# EAGLE board WDT (EAGLE 8.5.0)
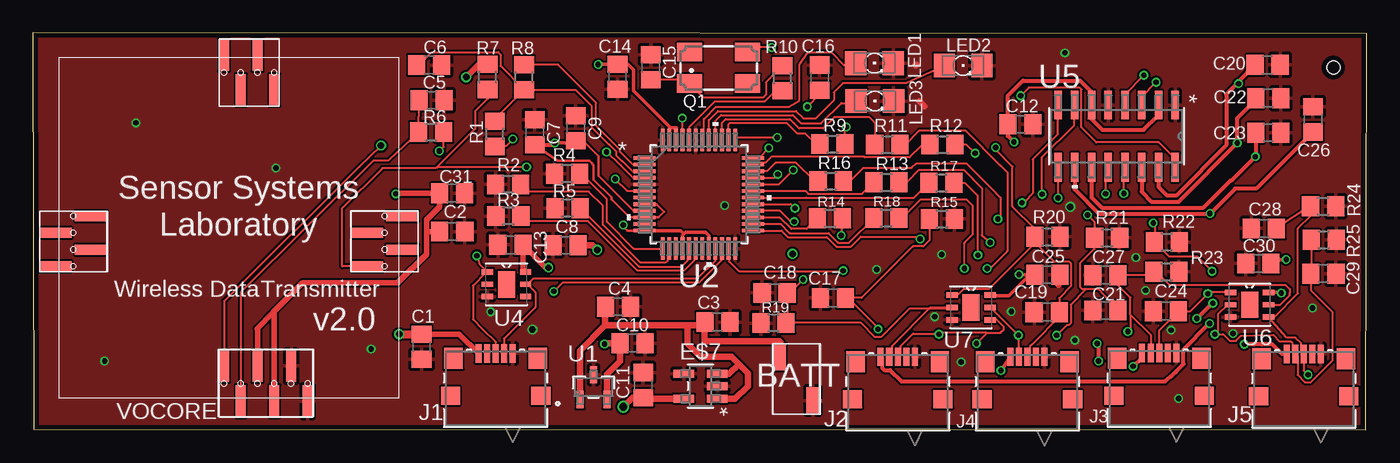
[diagram p0: board, top side]
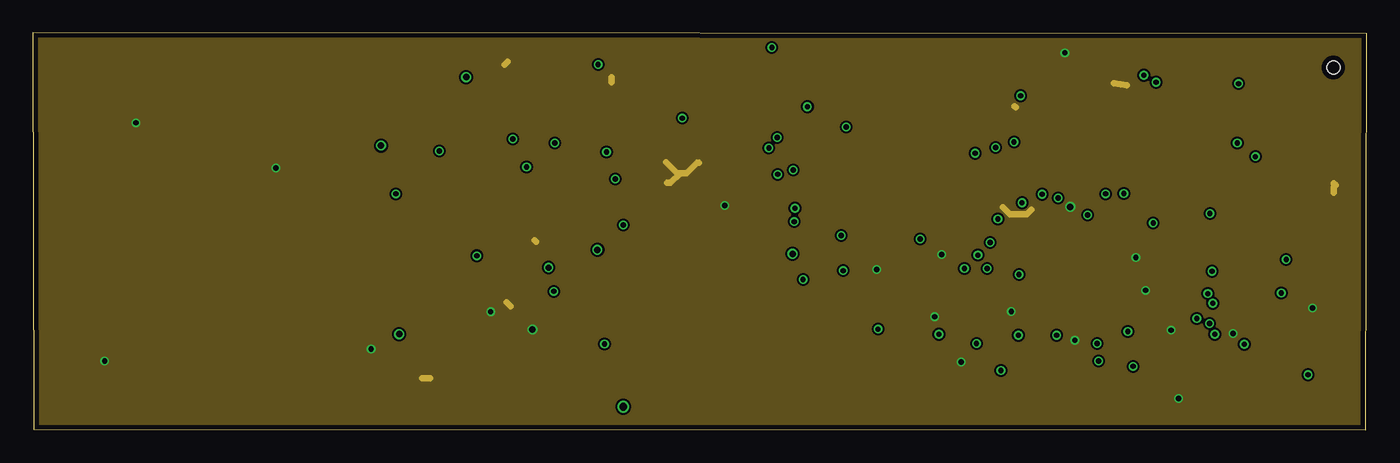
[diagram p1: board, inner layer Route2]
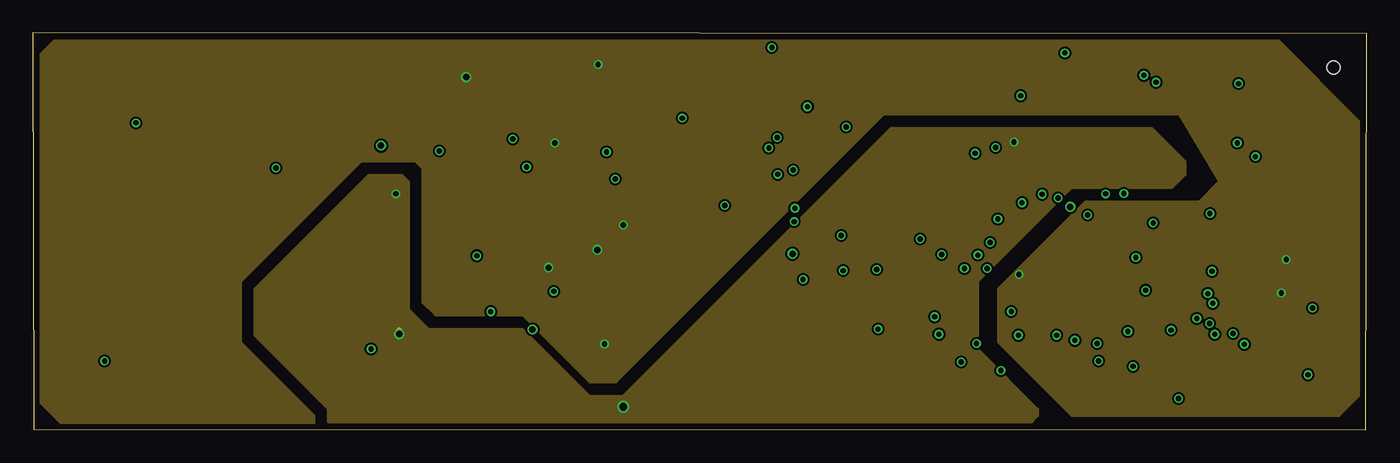
[diagram p2: board, inner layer Route3]
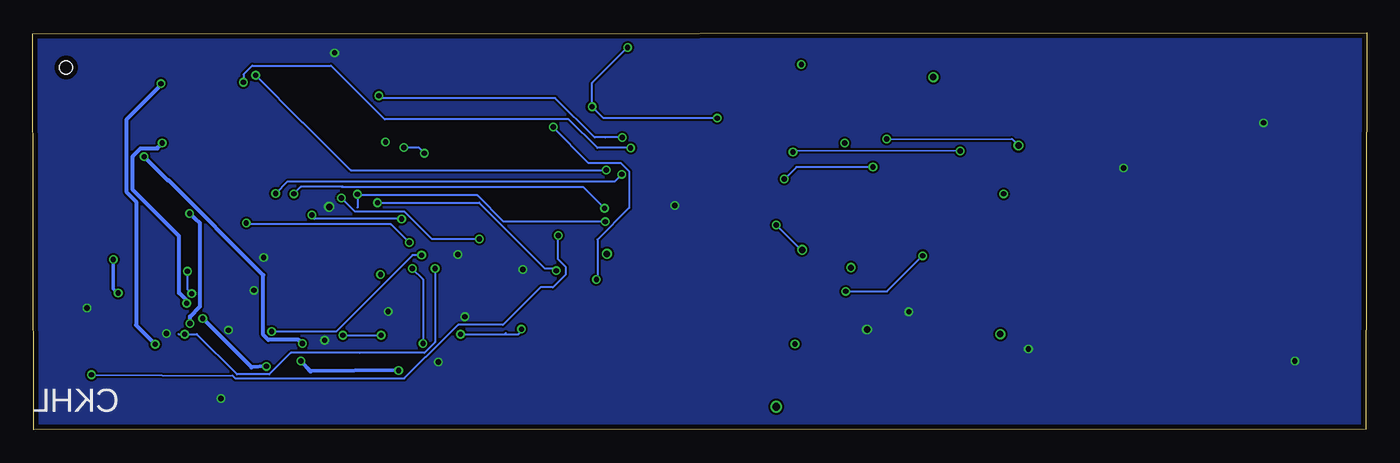
[diagram p3: board, bottom side, seen from below]

Size 101.17 x 30.08 mm. Coordinates in mm from the lower left corner, seen from the top.
Outline: 0.05,0.03 101.12,0 101.17,30 0,30.08 0.05,0.03
Copper layers ((1*2)+(3*16)): Top 0.035mm / dielectric 20mil / Route2 0.035mm / dielectric 20mil / Route3 0.035mm / dielectric 20mil / Bottom 0.035mm
Design rules "default *": minimum track width 6mil, minimum drill 15mil, track to track 6mil, track to pad 6mil, pad to pad 6mil, via to via 6mil, smd to smd 6mil, copper to edge 15mil, drill to drill 6mil, minimum pad ring 10mil, minimum via ring 5mil, stop-mask expansion 4mil, vias tented up to drill 15mil, thermal gap 10mil
Net classes: 0 default: width 0.102 mm, drill 0.203 mm, clearance 0.152 mm; 1 power: width 0.762 mm, drill 0.508 mm, clearance 0.254 mm; 2 usbsignal: width 0.305 mm, drill 0.508 mm, clearance 0.508 mm
Holes 1 mm at 98.65,27.46

## Footprints (pad centres in the part's own frame; a part is rotated, then mirrored left to right if it is on the bottom)
C0805 = smd 1.3 x 1.5: 1 -0.95,0; 2 0.95,0
FEMALE-POWER = smd 1 x 2: P$1 0.5,4.3; P$2 3.04,1
850-10-050-30-001101 = smd 0.762 x 2.413: P$1 0.381,3.873; P$2 1.651,1.206; P$3 2.921,3.873; P$4 4.191,1.206
850-10-050-30-001101' = smd 0.762 x 2.413: P$1 0.381,3.873; P$2 1.651,1.206; P$3 2.921,3.873; P$4 4.191,1.206; P$5 5.461,3.873; P$6 6.731,1.206
MF05A-M = smd 1.575 x 0.61: 1 -1.27,0.953; 2 -1.27,0; 3 -1.27,-0.953; 4 1.27,-0.953; 5 1.27,0.953
CONN_1981568-1 = smd 0.457 x 1.397: 1 0,-0.254; 2 0.65,-0.254; 3 1.3,-0.254; 4 1.95,-0.254; 5 2.6,-0.254 | smd 1.397 x 1.6: 6 -1.9,-0.635; 7 4.5,-0.635 | smd 1.448 x 1.346: 8 -2.129,-3.48; 9 4.729,-3.48
LED_1206 = smd 1.6 x 1.803: A -1.422,0; C 1.422,0
CTS406 = smd 1.9 x 1.4: 1 -2.2,-1.2; 2 2.2,-1.2; 3 2.2,1.2; 4 -2.2,1.2
R0805 = smd 1.3 x 1.5: 1 -0.95,0; 2 0.95,0
SOT-23 = smd 0.561 x 1.321: 1 -1.025,-0.945; 2 1.025,-0.945; 3 0,0.945
PT48 = smd 1.676 x 0.279: 1 -4.115,2.75; 2 -4.115,2.25; 3 -4.115,1.75; 4 -4.115,1.25; 5 -4.115,0.75; 6 -4.115,0.25; 7 -4.115,-0.25; 8 -4.115,-0.75; 9 -4.115,-1.25; 10 -4.115,-1.75; 11 -4.115,-2.25; 12 -4.115,-2.75; 25 4.115,-2.75; 26 4.115,-2.25; 27 4.115,-1.75; 28 4.115,-1.25; 29 4.115,-0.75; 30 4.115,-0.25; 31 4.115,0.25; 32 4.115,0.75; 33 4.115,1.25; 34 4.115,1.75; 35 4.115,2.25; 36 4.115,2.75 | smd 0.279 x 1.676: 13 -2.75,-4.115; 14 -2.25,-4.115; 15 -1.75,-4.115; 16 -1.25,-4.115; 17 -0.75,-4.115; 18 -0.25,-4.115; 19 0.25,-4.115; 20 0.75,-4.115; 21 1.25,-4.115; 22 1.75,-4.115; 23 2.25,-4.115; 24 2.75,-4.115; 37 2.75,4.115; 38 2.25,4.115; 39 1.75,4.115; 40 1.25,4.115; 41 0.75,4.115; 42 0.25,4.115; 43 -0.25,4.115; 44 -0.75,4.115; 45 -1.25,4.115; 46 -1.75,4.115; 47 -2.25,4.115; 48 -2.75,4.115
SON95P315X315X80-7N = smd 0.864 x 0.406: 1 -1.448,0.94; 2 -1.448,0; 3 -1.448,-0.94; 4 1.448,-0.94; 5 1.448,0; 6 1.448,0.94 | smd 1.295 x 2.007: 7 0,0
D16 = smd 2.184 x 0.559: 1 -2.362,4.445; 2 -2.362,3.175; 3 -2.362,1.905; 4 -2.362,0.635; 5 -2.362,-0.635; 6 -2.362,-1.905; 7 -2.362,-3.175; 8 -2.362,-4.445; 9 2.362,-4.445; 10 2.362,-3.175; 11 2.362,-1.905; 12 2.362,-0.635; 13 2.362,0.635; 14 2.362,1.905; 15 2.362,3.175; 16 2.362,4.445

## Placement (x,y rotation side)
C1  33uf  [C0805]  29.49,6.29 270 top
C2  0.1pF  [C0805]  31.81,15.02 0 top
C3  1pF  [C0805]  51.92,8.16 0 top
C4  1pF  [C0805]  44.38,9.32 0 top
C5  22pF  [C0805]  30.25,24.98 0 top
C6  22pF  [C0805]  30.05,27.65 0 top
C7  4.7uF  [C0805]  38.07,22.55 270 top
C8  4.7uF  [C0805]  40.41,13.98 0 top
C9  4.7uF  [C0805]  41.18,22.85 90 top
C10  1pF  [C0805]  45.5,6.56 0 top
C11  1pF  [C0805]  46.29,3.38 90 top
C12  0.1pF  [C0805]  74.9,23.16 0 top
C13  0.1pF  [C0805]  36.22,14.01 180 top
C14  0.1pF  [C0805]  44.35,26.76 90 top
C15  27pF  [C0805]  46.88,27.47 90 top
C16  27pF  [C0805]  59.68,26.7 90 top
C17  22pF  [C0805]  60.68,9.99 0 top
C18  22pF  [C0805]  56.27,10.37 0 top
C19  22pF  [C0805]  76.91,8.91 0 top
C20  33uf  [C0805]  93.66,27.66 180 top
C21  22pF  [C0805]  81.36,9.04 0 top
C22  33uf  [C0805]  93.71,25.14 180 top
C23  33uf  [C0805]  93.71,22.51 180 top
C24  22pF  [C0805]  85.94,8.99 0 top
C25  0.1pF  [C0805]  76.95,11.75 0 top
C26  33uf  [C0805]  97.1,23.53 270 top
C27  22pF  [C0805]  81.36,11.72 0 top
C28  22pF  [C0805]  93.37,15.26 0 top
C29  22pF  [C0805]  97.9,11.83 180 top
C30  0.1pF  [C0805]  92.96,12.6 180 top
C31  0.1pF  [C0805]  31.79,17.93 0 top
E$1  [FEMALE-POWER]  56.13,1.2 0 top
E$2  [850-10-050-30-001101]  14.11,24.55 0 top
E$4  [850-10-050-30-001101']  14.11,0.96 0 top
E$5  [850-10-050-30-001101]  29.22,12.01 90 top
E$6  [850-10-050-30-001101]  5.6,12.01 90 top
E$7  [MF05A-M]  50.65,3.3 180 top
J1  1981568-1  [CONN_1981568-1]  33.8,6.04 0 top
J2  1981568-1  [CONN_1981568-1]  64.31,5.78 0 top
J3  1981568-1  [CONN_1981568-1]  84.14,6.05 0 top
J4  1981568-1  [CONN_1981568-1]  74.14,5.78 0 top
J5  1981568-1  [CONN_1981568-1]  95.1,6 0 top
LED1  [LED_1206]  63.84,27.79 0 top
LED2  [LED_1206]  70.56,27.61 0 top
LED3  [LED_1206]  63.87,24.92 0 top
Q1  20pF  [CTS406]  52.01,27.44 0 top
R1  27  [R0805]  35.04,22.43 90 top
R2  15k  [R0805]  36.04,18.6 180 top
R3  15k  [R0805]  36.06,16.2 180 top
R4  15k  [R0805]  40.51,19.4 180 top
R5  15k  [R0805]  40.54,16.8 180 top
R6  27  [R0805]  30.2,22.57 0 top
R7  1.5k  [R0805]  34.49,26.75 90 top
R8  1.5k  [R0805]  37.25,26.72 90 top
R9  27  [R0805]  60.66,21.67 0 top
R10  15k  [R0805]  56.86,26.64 90 top
R11  27  [R0805]  64.81,21.62 0 top
R12  27  [R0805]  69,21.62 0 top
R13  27  [R0805]  64.74,18.77 0 top
R14  27  [R0805]  60.46,16.03 0 top
R15  15k  [R0805]  68.96,15.98 0 top
R16  27  [R0805]  60.52,18.86 0 top
R17  27  [R0805]  68.91,18.72 0 top
R18  27  [R0805]  64.74,16.04 0 top
R19  15k  [R0805]  56.18,8.09 180 top
R20  15k  [R0805]  76.96,14.62 0 top
R21  15k  [R0805]  81.48,14.55 0 top
R22  15k  [R0805]  86.02,14.23 0 top
R23  15k  [R0805]  85.99,11.97 0 top
R24  15k  [R0805]  97.87,16.95 0 top
R25  15k  [R0805]  97.92,14.41 0 top
U1  AP7313-33SAG-7  [SOT-23]  42.53,3.22 0 top
U2  TUSB2077APTR  [PT48]  50.52,17.85 0 top
U4  TPD4E001DRSR.  [SON95P315X315X80-7N]  35.93,11.02 0 top
U5  TPS2044BD  [D16]  82.21,22.25 270 top
U6  TPD4E001DRSR.  [SON95P315X315X80-7N]  92.3,9.47 0 top
U7  TPD4E001DRSR.  [SON95P315X315X80-7N]  71.17,9.27 0 top

## Library data of the parts
C1-C31 = eagle-ltspice; SPICEMODEL: NONE; SPICEPREFIX: C
E$1 = FE-HEADER-2
E$2 E$5 E$6 = HEADER-4-circle
E$4 = HEADER-6-circle
E$7 = 6v-5vIC-LP3895
J1-J5 = MicroUSB; MANUFACTURER_PART_NUMBER: 19815681; VENDOR: Tyco Electronics
LED1-LED3 = eagle-ltspice; SPICEMODEL: NONE; SPICEPREFIX: D; SPICETYPE: diode
Q1 = crystal; OC_FARNELL: unknown; OC_NEWARK: unknown
R1-R25 = eagle-ltspice; SPICEMODEL: NONE; SPICEPREFIX: R
U1 = AP7313-33SAG(6V-3.3V); MANUFACTURER_PART_NUMBER: AP731333SAG7; VENDOR: Diodes Inc
U2 = TUSB2077A-7-PortHubUSB; MANUFACTURER_PART_NUMBER: TUSB2077APTR; VENDOR: Texas Instruments
U4 U6 U7 = TPD4E001DRSR.; AVAILABILITY: Good; DESCRIPTION: Low-Capacitance 4-Channel %2B/-15-kV ESD Protection Array for High-Speed Data Interfaces 6-SON -40 to 85; MF: Texas Instruments; MP: TPD4E001DRSR; PACKAGE: WSON-6 Texas Instruments; PRICE: 0.33 USD
U5 = TPS2044(Power-Distribution Switches); MANUFACTURER_PART_NUMBER: TPS2044BD; VENDOR: Texas Instruments

## Nets
GND: C1.2 C2.2 C3.2 C4.2 C5.2 C6.2 C7.1 C8.1 C9.2 C10.2 C11.2 C12.2 C13.2 C14.1 C15.2 C16.2 C17.1 C18.1 C19.1 C20.1 C21.1 C22.1 C23.1 C24.1 C25.2 C26.1 C27.1 C28.1 C29.1 C30.2 C31.2 E$1.P$2 E$4.P$5 E$4.P$6 E$7.2 E$7.4 J1.5 J2.5 J3.5 J4.5 J5.5 LED1.C LED2.C LED3.C R2.2 R3.2 R4.2 R5.2 R15.2 R19.2 R20.2 R21.2 R22.2 R23.2 R24.2 R25.2 U1.3 U2.5 U2.24 U2.43 U2.48 U4.3 U5.1 U5.5 U6.3 U7.3
N27: U2.37 U5.16
N$1: C3.1 C4.1 E$1.P$1 E$7.1 E$7.3 U1.1
N$2: E$5.P$1 R7.1 U2.6
N$3: R8.2 U2.2
N$4: R10.1 U2.44
N$5: R5.1 U2.17
N$6: C24.2 J3.3 R13.2 R22.1 U6.1
N$7: C27.2 J3.2 R17.2 R23.1 U6.5
N$8: C22.2 J3.1 U5.14
N$9: LED1.A U2.42
N$10: C17.2 J2.3 R11.2 R15.1 U7.4
N$11: C18.2 J2.2 R9.2 R19.1 U7.2
N$12: C19.2 J4.3 R12.2 R20.1 U7.1
N$13: C21.2 J4.2 R16.2 R21.1 U7.5
N$14: C28.2 J5.3 R14.2 R24.1 U6.4
N$15: C29.2 J5.2 R18.2 R25.1 U6.2
N$16: J1.4 U2.21 U4.5
N$17: J1.3 U2.22 U4.1
N$18: R14.1 U2.27
N$19: R9.1 U2.38
N$20: R11.1 U2.39
N$21: C6.1 R1.2 R8.1 U2.3
N$22: C5.1 E$4.P$2 R6.1
N$23: C26.2 J2.1 U5.10
N$24: C23.2 J4.1 U5.11
N$25: C20.2 J5.1 U5.15
N$26: R4.1 U2.13
N$27: R3.1 U2.18
N$28: U2.29 U5.12
N$29: E$4.P$1 R1.1
N$30: U2.33 U5.13
N$31: R6.2 U2.4
N$32: R2.1 U2.14
N$33: R12.1 U2.35
N$34: R17.1 U2.30
N$35: U2.25 U5.9
N$36: R13.1 U2.31
N$37: R18.1 U2.26
N$38: R16.1 U2.34
N$39: LED2.A U2.41
N$40: LED3.A U2.40
N$41: C16.1 Q1.3 U2.45
N$42: C15.1 Q1.1 R10.2
PWRON1: U2.36 U5.3
PWRON2: U2.32 U5.4
PWRON3: U2.28 U5.7
PWRON4: U2.23 U5.8
VCC-3.3V: C7.2 C8.2 C9.1 C10.1 C13.1 C14.2 C25.1 C30.1 R7.2 U1.2 U2.8 U2.9 U2.10 U2.12 U2.16 U2.20 U2.46 U2.47 U4.6 U6.6 U7.6
VCC-5V: C1.1 C2.1 C11.1 C12.1 C31.1 E$4.P$3 E$4.P$4 E$7.5 J1.1 U5.2 U5.6

## Tracks (layer width: path | path; a pad name or v marks a point on that pad's centre or on a via)
GND  (via drill 0.4, 0.5)
  Top 0.152: 94.64,25.17 C22.1
  Top 0.406: 82.35,13.95 82.35,14.08 R21.2
  Top 0.508: R22.2 86.99,14.25 | LED2.C 71.98,26.95 | 67.23,24.92 67.61,24.54 | 67,27.66 66.98,27.64 66.96,27.67 | C19.1 75.96,9.18 | 77.77,11 77.77,11.63 C25.2 | 94.61,25.19 94.64,25.17
  Route2 0.508: 98.69,18.7 98.69,18.64 98.82,18.52 98.69,18.39 98.69,17.96 | 49.12,19.46 48.86,19.46 48.04,20.28 | 49.12,19.46 49.59,19.46 50.38,20.24 50.55,20.24 | 48.11,18.72 48.38,18.72 49.12,19.46 | 82.02,26.27 82.98,26.12 | 75.76,16.69 75.4,16.33 74.11,16.33 73.57,16.86 | 74.46,24.54 74.56,24.44 | 43.87,26.72 43.87,26.36 | 35.79,27.67 36.01,27.9 | 38.05,14.35 38.15,14.25 | 29.51,3.89 30.12,3.89 | 36.22,9.37 35.92,9.68
  other vias: 78.69,16.89 37.9,7.59 18.44,19.84 7.82,23.27 5.44,5.21 52.48,16.99 86.92,2.36 78.28,28.58 25.65,6.12 97.08,9.22 70.41,5.13 84.4,10.57 74.22,8.97 86.33,7.54 91.03,7.29 64.01,12.14 83.67,13.06 79.04,6.78 68.94,13.28 68.4,8.56 34.72,8.94
  pour Route2: -0.95,31.03 101.95,30.75 102.05,-0.97 -0.95,-0.97
  pour Top: -0.95,31.03 101.97,30.77 102.05,-0.97 -0.95,-0.97
  pour Bottom: -0.95,31.03 101.97,30.77 102.05,-0.97 -0.95,-0.97
N27  (via drill 0.4)
  Top 0.152: 74.93,25.22 v74.93,25.32 75.54,25.93 77.38,25.93 77.39,25.94 79.4,25.94 79.54,25.8 79.54,22.92 80.67,21.79 85.39,21.79 86.65,20.54 U5.16 | U2.37 53.47,22.16 v56.46,22.16
  Bottom 0.152: v56.46,22.16 57.73,22.16 58.56,22.16 61.55,25.15 73.96,25.15 74.75,25.15 v74.93,25.32
N$1
  Top 0.508: 43.41,7.9 43.41,9.3 C4.1 | 43.41,7.9 49.66,7.9 | 49.66,7.9 50.72,7.9 C3.1 50.95,8.14 50.95,6.71 56.62,6.71 56.69,6.63 56.69,5.56 E$1.P$1 | 43.41,7.9 41.5,6 U1.1 | 49.66,7.9 49.66,6.5 50.65,5.51 53.01,5.51 53.54,4.98 | 53.54,4.98 54.23,4.29 54.23,3.3 53.28,2.35 E$7.1 | 53.54,4.98 52.82,4.25 E$7.3
N$2  (via drill 0.4)
  Top 0.152: R7.1 34.49,25.09 33.55,24.14 33.55,22.8 30.67,19.93 | 30.67,19.93 30.58,19.84 26.52,19.84 23.42,16.74 23.42,12.44 23.47,12.39 E$5.P$1 | 30.67,19.93 37.45,19.93 37.46,19.91 v37.44,19.91 | v44.17,19 45.07,18.1 U2.6
  Bottom 0.152: v37.44,19.91 43.26,19.91 v44.17,19
N$3
  Top 0.152: U2.2 45.51,20.1 44.55,21.06 44.55,21.23 42.72,23.06 42.72,24.79 39.84,27.67 R8.2
N$4
  Top 0.152: U2.44 49.77,22.93 51.71,24.87 55.5,24.87 56.32,25.69 R10.1
N$5
  Top 0.152: U2.17 49.65,13.62 49.65,12.81 49.2,12.36 45.98,12.36 41.55,16.8 R5.1
N$6  (via drill 0.4)
  Top 0.152: 85.1,14.23 R22.1 | 85.1,14.23 86.18,13.15 88.32,13.15 v89.45,12.01 | v84.99,15.67 85.1,15.56 85.1,14.23 | v72.62,14.2 71.99,14.75 71.99,18.31 70.61,19.69 67.22,19.69 66.29,18.77 R13.2 | U6.1 89.23,10.41 v89.13,10.31 87.8,8.99 C24.2 85.44,7.54 J3.3
  Bottom 0.152: v72.62,14.2 74.01,15.57 84.89,15.57 v84.99,15.67 | v89.45,12.01 89.45,10.64 v89.13,10.31
N$7  (via drill 0.4)
  Top 0.152: 71.68,13.44 71.78,13.23 v71.68,13.23 71.68,17.73 70.74,18.67 69.91,18.67 R17.2 | 83.26,8.71 83.26,7.65 v83.06,7.44 | 83.26,8.71 83.26,10.01 82.31,10.96 C27.2 85.03,11.72 R23.1 85.22,11.97 86.2,10.98 95.02,10.98 95.35,10.66 95.35,10.37 95.35,10.36 95.35,10.2 94.63,9.47 U6.5 | J3.2 84.79,7.19 83.26,8.71
  Bottom 0.152: v83.06,7.44 78.17,7.44 72.38,13.23 v71.68,13.23
N$8  (via drill 0.4)
  Top 0.152: 93.01,24.89 92.83,25.08 C22.2
  Top 0.305: J3.1 84.14,5.4 v83.46,4.8 | v88.29,8.43 88.32,8.43 89.51,9.63 v89.51,9.59 | U5.14 84.11,18.05 84.86,17.3 86.92,17.3 v91.36,21.74 91.36,23.61 92.83,25.08
  Bottom 0.305: v83.46,4.8 84.58,4.72 v88.29,8.43 | v89.51,9.59 89.51,9.8 90.08,10.38 90.08,14.67 93.6,18.19 93.6,20.73 93,21.33 91.72,21.33 91.72,21.38 v91.36,21.74
N$9
  Top 0.152: LED1.A 61.54,27.64 60.56,28.62 58.8,28.62 58.15,27.66 58.15,24.95 57.36,24.47 51.83,24.47 50.9,23.54 50.9,22.1 U2.42
N$10  (via drill 0.4)
  Top 0.152: 61.84,9.99 C17.2 62.85,9.99 66.76,13.9 67.54,13.9 68.01,14.37 R15.1 68.05,15.98 68.3,15.72 | 61.84,9.99 64.11,7.72 v64.11,7.62 | U7.4 73.13,8.33 73.61,7.85 73.61,7.54 73.41,7.34 72.34,7.34 | 72.34,7.34 68.83,7.34 v68.73,7.24 68.68,7.29 66.77,7.29 65.8,6.32 65.8,5.72 J2.3 | R11.2 66.18,21.62 67.26,22.7 70.73,22.7 73.41,20.03 73.42,20.03 73.91,19.53 73.91,13.54 72.59,12.22 v72.39,12.22 | v71.58,6.53 72.34,7.29 72.34,7.34 | 62.02,9.99 61.84,9.99
  Bottom 0.152: v68.73,7.24 65.38,7.24 | 65.38,7.24 65.28,7.34 | v72.39,12.22 71.58,11.4 v71.58,6.53 | 65.38,7.24 64.31,7.24 64.11,7.52 v64.11,7.62
N$11  (via drill 0.4)
  Top 0.152: R19.1 57.22,8.18 C18.2 57.41,10.37 v58.42,11.38 | R19.1 | R9.2 61.61,22.79 v61.7,22.95 | J2.2 65.15,5.72 65.15,6.32 68.09,9.27 U7.2 69.61,9.16 66.47,9.16 64.33,7.01 63.89,7.01 62.81,8.09 R19.1
  Bottom 0.152: v61.7,22.95 59.06,20.24 56.58,20.24 55.93,19.59 55.93,16.81 58.34,14.4 58.34,11.38 v58.42,11.38
N$12  (via drill 0.4)
  Top 0.152: 76.03,14.17 R20.1 75.98,15.26 74.32,16.92 74.32,19.94 73,21.26 73,21.36 v73.04,21.4 | 78.01,8.41 77.94,8.62 | 77.94,8.62 C19.2 77.86,9.98 78.77,10.9 78.77,12.59 78.64,12.73 77.47,12.73 76.03,14.17 | v71.48,20.96 70.81,21.62 R12.2 | U7.1 70.13,10.21 70.61,10.69 72.55,10.69 76.03,14.17 | J4.3 75.63,5.72 75.63,6.32 75.77,6.45 77.94,8.62
  Bottom 0.152: v73.04,21.4 71.92,21.4 v71.48,20.96
N$13  (via drill 0.4)
  Top 0.152: C21.2 80.86,10.64 79.88,10.64 | 79.88,10.64 79.62,10.64 79.43,10.83 79.43,12.6 80.53,13.71 R21.1 80.53,15.75 v80.01,16.28 | R16.2 62.01,18.86 63,19.85 66.65,19.85 67.01,20.2 70.82,20.2 72.69,18.32 72.69,18.31 73.41,17.6 73.41,16.18 v73.2,15.98 | U7.5 72.65,9.27 v74.75,7.16 74.75,5.56 J4.2 | 79.88,10.64 78.73,9.49 78.73,8.06 78.6,7.93 78.44,7.93 v77.67,7.16
  Bottom 0.152: v73.2,15.98 79.81,15.98 80.01,16.18 v80.01,16.28 | v77.67,7.16 v74.76,7.16 v74.75,7.16
N$14  (via drill 0.4)
  Top 0.152: C28.2 96.85,16.95 R24.1 96.92,16.22 95.97,15.27 95.97,10.34 94.17,8.53 U6.4 | U6.4 93.77,8.56 | R14.2 61.32,15.94 v61.32,14.73 | U6.4 95.12,6.98 95.77,6.98 96.21,6.54 96.21,5.94 J5.3 96.4,4.48 v96.72,4.17
  Bottom 0.152: v61.32,14.73 61.32,12.91 60.75,12.35 60.75,11.76 61.72,10.79 62.67,10.79 65.51,7.95 68.91,7.95 71.35,5.51 71.37,5.51 73,3.89 85.82,3.89 86.02,4.09 v96.72,4.17
N$15  (via drill 0.4)
  Top 0.152: 96.97,13.7 R25.1 96.97,11.85 C29.2 96.95,10.57 98.58,8.94 98.58,5.23 | v70.66,12.22 70.66,14.17 71.3,14.81 71.3,16.99 70.84,17.45 67.34,17.45 66.37,16.48 66.13,16.48 R18.2 | U6.2 90.63,9.47 89.89,8.74 89.89,7.47 v89.66,7.24 | 89.79,7.11 v89.66,7.24 | 98.58,5.23 98.6,5.25 | v89.66,7.24 90.3,7.24 90.8,6.73 91.26,6.73 91.64,7.11 94.08,7.19 94.59,6.68 95.43,6.68 95.56,6.54 95.56,5.94 J5.2 95.95,5.56 95.95,4.16 96.49,3.61 96.95,3.61 98.45,5.11 98.58,5.23
  Bottom 0.152: 90.12,7.24 v89.66,7.24 88.74,7.24 85.7,4.19 83.24,4.19 81.62,5.82 76.35,5.82 | 76.35,5.82 | 76.35,5.82 71.47,5.82 70.66,6.63 v70.66,12.22
N$16
  Top 0.152: U4.5 37.48,11.13 37.48,11.06 37.52,11.02 | 37.52,11.02 38.12,10.42 38.12,9.29 35.74,6.91 35.74,6.5 35.74,5.8 J1.4 | 37.52,11.02 37.95,11.45 50.39,11.45 51.77,12.83 U2.21
N$17  (via drill 0.4)
  Top 0.152: v33.68,13.18 33.88,12.56 U4.1 34.42,11.96 33.38,10.92 33.38,8.36 34.14,7.59 35.08,6.65 35.08,5.81 J1.3 | v39.52,10.49 40.18,11.14 50.52,11.14 52.27,12.89 U2.22
  Bottom 0.152: v39.52,10.49 36.37,10.49 v33.68,13.18
N$18
  Top 0.152: U2.27 56.65,16.1 57.53,15.22 58.7,15.22 R14.1
N$19
  Top 0.152: R9.1 59.39,21.67 58.58,22.47 57.96,22.47 57.18,23.25 52.86,23.25 52.77,23.16 U2.38 52.77,22.59 52.7,22.66
N$20
  Top 0.152: 52.31,22.01 U2.39 52.27,23.27 52.55,23.55 57.42,23.55 57.73,23.24 57.8,23.18 58.12,22.85 59.94,22.85 60.79,23.7 63.45,23.7 63.86,23.29 R11.1
N$21
  Top 0.152: R8.1 35.47,27.58 35.47,28.44 35.29,28.63 30.26,28.63 29.28,27.65 C6.1 | R8.1 41.16,25.77 42.39,24.55 42.39,22.92 43.69,21.61 43.74,21.61 44.25,21.11 44.25,20.79 44.26,20.77 44.7,20.37 44.71,20.37 45.48,19.6 U2.3 | R8.1 35.04,23.56 R1.2
N$22
  Top 0.152: C5.1 29.28,24.96 R6.1 26.97,20.42 25.84,20.42 15.76,10.43 E$4.P$2
N$23  (via drill 0.4)
  Top 0.152: v89.26,8.05 89.15,7.95 89.05,7.95 87.3,6.2 87.3,4.97 86.72,4.39 | 91.19,18.27 91.13,18.27 | 97.05,22.53 C26.2
  Top 0.305: v89.26,8.05 87.27,6.07 87.27,4.98 86.31,4.01 | U5.10 79.03,18.23 80.87,16.38 v89.29,16.38 89.31,16.38 91.19,18.27 | 97.05,22.53 92.8,18.27 91.19,18.27 | J2.1 64.42,5.41 64.42,4.7 64.6,4.52 65.02,4.52 65.89,3.66 85.88,3.66 86.72,4.39
  Bottom 0.305: v89.26,8.05 89.26,8.58 88.5,9.34 88.5,15.67 v89.29,16.38
N$24  (via drill 0.4)
  Top 0.152: 80.7,6.61 80.72,6.63 80.72,6.54 v80.73,6.53 | 92.41,22.31 C23.2 92.33,22.51
  Top 0.305: v80.85,5.21 80.85,6.41 v80.73,6.53 | U5.11 80.3,17.62 81.08,16.84 88.8,16.84 90.87,18.9 90.94,18.9 v92.74,20.7 92.76,20.72 C23.2 | J4.1 73.38,4.44 v73.43,4.5
  Top 0.406: J4.1 74.14,5.37
  Bottom 0.305: 80.77,5.03 80.77,5.21 | 80.77,5.21 v80.85,5.21 | v92.74,20.7 90.94,18.9 90.87,18.9 83.69,11.72 83.69,7.18 83.32,6.81 81.01,6.81 v80.73,6.53 | 80.14,4.42 80.35,4.69 | 80.35,4.69 80.77,5.21 | v73.43,4.5 80.08,4.42 80.35,4.69
N$25  (via drill 0.4)
  Top 0.305: C20.2 91.47,26.42 v91.47,26.24 91.34,26.24 90.53,25.43 90.53,21.55 86.73,17.75 86.05,17.75 85.42,18.39 85.42,19.85 U5.15 | v91.9,6.48 92.63,6.48 93.25,6.47 94.03,6.47 94.75,5.75 J5.1
  Bottom 0.305: v91.47,26.24 91.36,26.24 94.06,23.55 94.06,18 93.34,17.29 93.34,7.92 v91.9,6.48
N$26
  Top 0.152: 41.84,19.02 R4.1 41.63,19.4 43.55,17.48 43.55,15.75 45.57,13.73 U2.13
N$27
  Top 0.152: U2.18 50.14,13.6 50.14,12.8 49.4,12.06 45.86,12.06 42.1,15.82 37.39,15.82 R3.1
N$28  (via drill 0.4)
  Top 0.152: U2.29 57.5,17.1 v57.81,16.79 | v81.38,17.88 81.38,19.7 U5.12
  Bottom 0.152: 77.72,18.41 77.65,18.41 | 77.65,18.41 59.43,18.41 v57.81,16.79 | 77.65,18.41 80.85,18.41 v81.38,17.88
N$29  (via drill 0.4, 0.5)
  Top 0.152: R1.1 35.9,21.5 36.25,21.84 v36.4,22.03 | v26.4,21.55 25.56,20.72 24.76,19.92 14.49,9.74 E$4.P$1
  Bottom 0.152: v36.4,22.03 26.91,22.06 v26.4,21.55
N$30  (via drill 0.4)
  Top 0.152: U2.33 56.23,19.1 v56.49,19.36 | v82.75,17.91 82.75,19.8 U5.13
  Bottom 0.152: v82.75,17.91 81.84,18.82 57.03,18.82 v56.49,19.36
N$31  (via drill 0.4)
  Top 0.152: v43.51,21.06 44.58,20.07 44.58,20.05 45.53,19.1 U2.4 | v30.84,21.13 31.15,21.45 R6.2
  Bottom 0.152: v30.84,21.13 43.54,21.11 v43.51,21.06
N$32
  Top 0.152: U2.14 48.14,13.6 48.14,12.8 48.01,12.67 46.11,12.67 43.24,15.53 43.24,16.97 42.15,18.06 39.04,18.06 | 37.53,18.06 37.22,18.36 | 39.04,18.06 37.53,18.06 | 39.04,18.06 37.53,18.06 | 37.53,18.06 R2.1
N$33
  Top 0.152: U2.35 54.77,20.23 55.57,20.23 56.02,20.69 63.07,20.69 63.11,20.64 66.5,20.64 67.48,21.62 R12.1
N$34
  Top 0.152: U2.30 58.68,17.6 58.7,17.57 66.82,17.57 R17.1
N$35  (via drill 0.4)
  Top 0.152: v77.77,17.57 77.77,19.88 U5.9 | v67.31,14.45 67.13,14.64 62.81,14.64 62.05,13.87 60.96,13.87 60.22,14.61 57.28,14.61 56.79,15.1 U2.25
  Bottom 0.152: 67.51,14.55 67.41,14.45 v67.31,14.45 70.9,14.45 72.97,16.53 76.74,16.53 v77.77,17.57 77.77,17.4
N$36
  Top 0.152: U2.31 58.61,18.1 58.83,17.88 62.9,17.88 R13.1
N$37
  Top 0.152: R18.1 61.92,14.18 61.09,14.18 60.35,14.91 57.4,14.91 56.72,15.6 U2.26
N$38
  Top 0.152: R16.1 59.27,18.86 57.9,20.24 56.34,20.24 55.7,19.6 U2.34
N$39
  Top 0.152: LED2.A 66.26,26.29 61.47,26.29 60.75,25.57 60.75,24.97 59.39,23.61 58.44,23.61 57.88,24.16 51.96,24.16 51.27,23.48 U2.41
N$40
  Top 0.152: 51.81,22.01 U2.40 51.77,23.42 52.21,23.86 57.65,23.86 58.28,23.23 59.78,23.23 61.32,24.77 62.29,24.77 LED3.A
N$41  (via drill 0.4)
  Top 0.152: 49.31,22.01 U2.45 | C16.1 59.68,25.42 v58.75,24.49 | U2.45 49.27,22.86 | U2.45 49.27,23.22 v49.25,23.62 | v56.06,28.98 54.56,28.98 Q1.3
  Bottom 0.152: v49.25,23.62 57.89,23.62 v58.75,24.49 58.75,26.29 v56.06,28.98
N$42
  Top 0.152: C15.1 49.52,26.52 Q1.1 50.87,25.17 55.37,25.17 55.6,25.4 55.6,26.33 R10.2
PWRON1  (via drill 0.4)
  Top 0.152: U2.36 55.07,20.6 v55.83,21.36 | U5.3 84.11,25.25 v85.2,26.34
  Bottom 0.152: v55.83,21.36 58.34,21.36 60.54,23.56 74.51,23.56 75.37,24.43 | 75.37,24.43 74.48,23.53 | 75.37,24.43 78.55,27.61 84.53,27.61 85.2,26.93 v85.2,26.34
PWRON2  (via drill 0.4)
  Top 0.152: U2.32 56.58,18.6 v57.67,19.68 | U5.4 82.84,25.41 v84.28,26.87
  Bottom 0.152: v84.28,26.87 80.72,23.29 80.67,23.29 77.07,19.68 v57.67,19.68
PWRON3  (via drill 0.4)
  Top 0.152: v76.56,17.86 76.56,20.65 78.99,23.09 78.99,24.58 U5.7 | U2.28 56.68,16.6 57.51,15.77 v57.76,15.77
  Bottom 0.152: v76.56,17.86 76.44,17.74 | v57.76,15.77 65.45,15.77 67.45,17.77 76.47,17.77 v76.56,17.86 | v76.56,17.86 76.56,16.84
PWRON4  (via drill 0.4)
  Top 0.152: U5.8 77.76,22.41 75.85,20.5 75.85,17.91 75.23,17.3 75.11,17.3 v75.03,17.21 | U2.23 52.8,13.7 52.8,12.76 53.55,12.01 61.62,12.01 61.58,12.06 v61.46,12.06
  Bottom 0.152: v75.03,17.21 67.32,17.21 62.4,12.29 | 62.4,12.29 62.32,12.21 | 62.32,12.21 62.4,12.29 | v61.46,12.06 61.61,12.21 62.32,12.21
S$27  (via drill 0.5)
  other vias: 57.63,13.33
VCC-3.3V  (via drill 0.4, 0.45, 0.5)
  Top 0.203: U2.12 45.12,15.1 44.78,15.44 v44.78,15.52 | U2.8 47.31,17.1 47.88,16.54 47.44,16.1 U2.10 45.27,16.1 43.88,17.49 43.88,17.62 42.54,18.95 42.54,20.07 42.37,20.24 42.37,20.25 42.22,20.4 39.8,20.4 C7.2 | U2.9 45.55,16.6 42.9,19.25 42.9,20.75 41.75,21.9 C9.1
  Top 0.254: U2.16 49.27,14.73 49.39,14.85 | 49.39,14.85 49.5,14.96 51.03,14.96 51.27,14.72 U2.20 | 49.39,14.85 49.14,15.1 U2.12 | U2.47 48.27,22.98 | 48.27,22.98 45.54,25.7 45.54,27.31 45.13,27.71 C14.2 43.13,27.71 v42.87,27.69 | 48.27,22.98 48.36,22.89 48.82,22.89 48.82,22.01 U2.46 | U7.6 72.66,10.16 74.04,10.16 75.63,11.75 C25.1 74.82,11.75 v74.8,11.76 | C30.1 94.21,12.9 v95.07,12.9 | U6.6 94.75,10.41 v94.7,10.36
  Top 0.305: v94.7,10.36 94.79,10.43 | C7.2 39.61,21.6 v39.6,21.74 41.17,21.67 C9.1
  Top 0.406: U4.6 37.17,12.17 C13.1 38.89,12.29 v39.12,12.29
  Top 0.508: C8.2 42.46,13.98 v42.81,13.63 | R7.2 33.83,27.7 v32.87,26.73 | U1.2 43.55,4.21 44.53,5.18 44.53,6.54 C10.1 43.41,6.56 v43.36,6.5
  Bottom 0.203: v44.78,15.52 42.89,13.63 v42.81,13.63
  Bottom 0.254: v95.07,12.9 95.07,10.69 94.82,10.44 v94.7,10.36
  pour Route3: 94.54,29.49 1.57,29.49 0.56,28.47 0.56,2.06 2.08,0.53 21.39,0.53 21.39,1.04 15.8,6.63 15.8,11.2 24.94,20.35 29.01,20.35 29.51,19.84 29.51,9.68 30.53,8.66 37.13,8.66 42.21,3.58 44.25,3.58 64.57,23.9 86.92,23.9 89.97,18.82 88.44,17.3 79.81,17.3 73.2,10.69 73.2,6.63 78.79,1.04 99.11,1.04 100.63,2.57 100.63,23.39
VCC-5V  (via drill 0.4, 0.5, 0.6)
  Top 0.305: U5.2 85.38,23.89 85.39,23.88 84.25,22.73 81.13,22.73 80.3,23.56 U5.6 80.3,25.62 79.45,26.47 75.11,26.47 73.95,25.31 C12.1 73.95,22.29 v74.42,21.82
  Top 0.406: 29.86,14.96 29.86,15.92 30.84,16.9 C31.1 27.58,17.93 v27.53,17.88 | 29.86,14.96 29.86,13.32 27.66,11.13 20.47,11.13 18.27,8.93 | 18.27,8.93 16.99,7.65 17.03,7.61 E$4.P$3 | 18.27,8.93 18.3,8.9 E$4.P$4 | J1.1 32.35,7.24 C1.1 | C2.1 29.92,15.02 29.86,14.96
  Top 0.508: v27.79,7.24 | v44.78,1.73 45.48,2.43 C11.1 46.37,2.35 E$7.5
  Top 0.61: v27.79,7.24 C1.1
  Route3 0.508: 27.79,7.5 v27.79,7.24
  pour Route3: 22.4,0.53 22.4,1.55 16.81,7.14 16.81,10.69 25.45,19.33 27.99,19.33 28.5,18.82 28.5,9.17 30.02,7.65 37.13,7.65 42.21,2.57 44.75,2.57 65.07,22.89 84.89,22.89 87.43,20.35 87.43,19.33 86.41,18.31 78.79,18.31 71.68,11.2 71.68,6.12 76.25,1.55 76.25,1.04 75.74,0.53

## Text on the board
tPlace: v2.0
bPlace: CKHL
tNames: Sensor Systems | Laboratory | Wireless Data | Transmitter | BATT | VOCORE